# EAGLE board PCB (EAGLE 9.7.0)
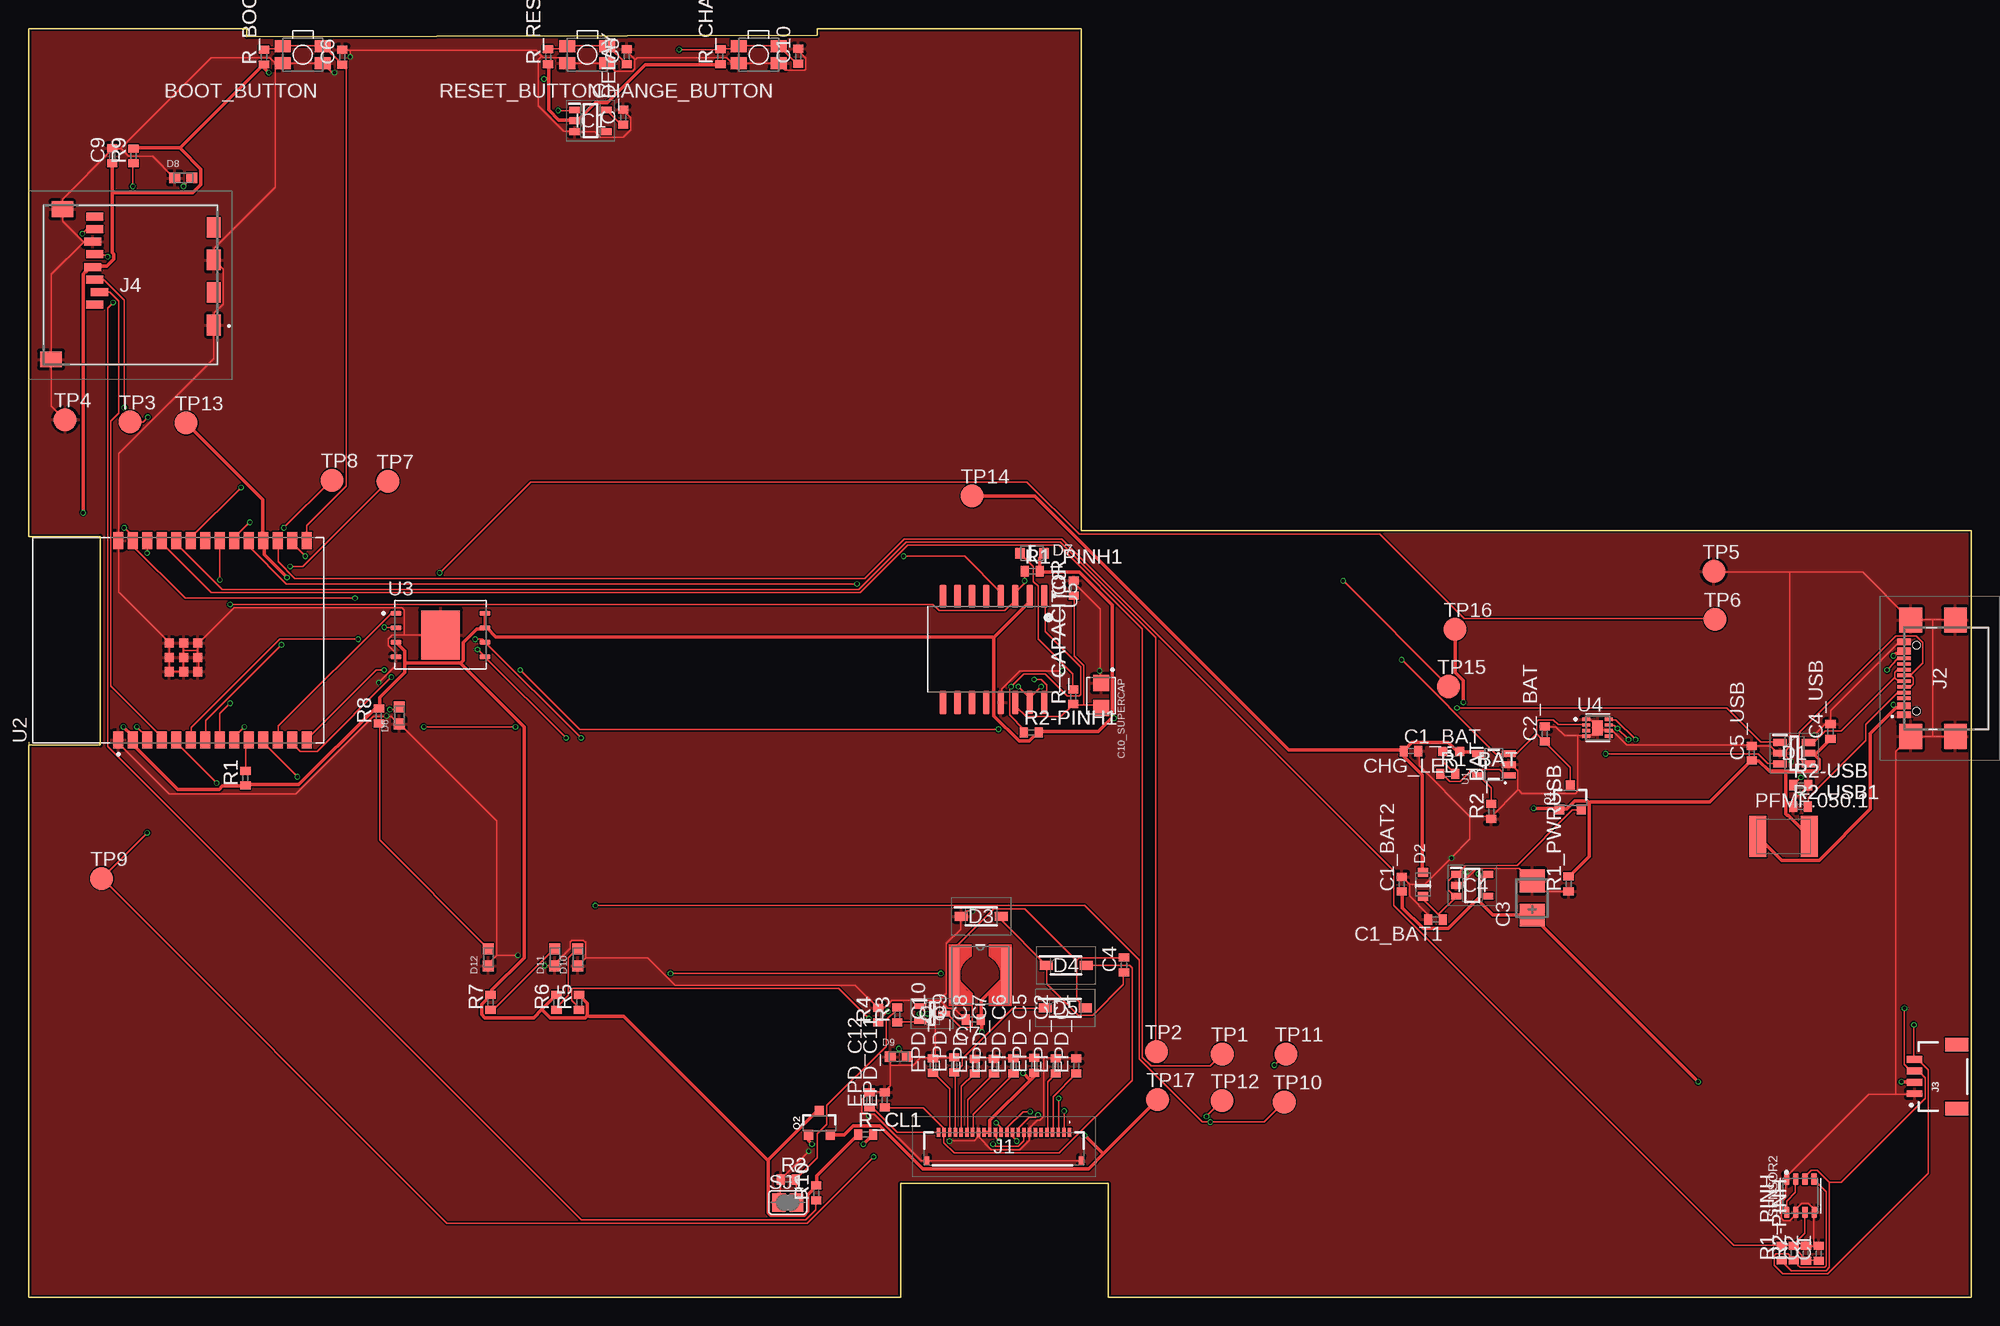
[diagram p0: board, top side]
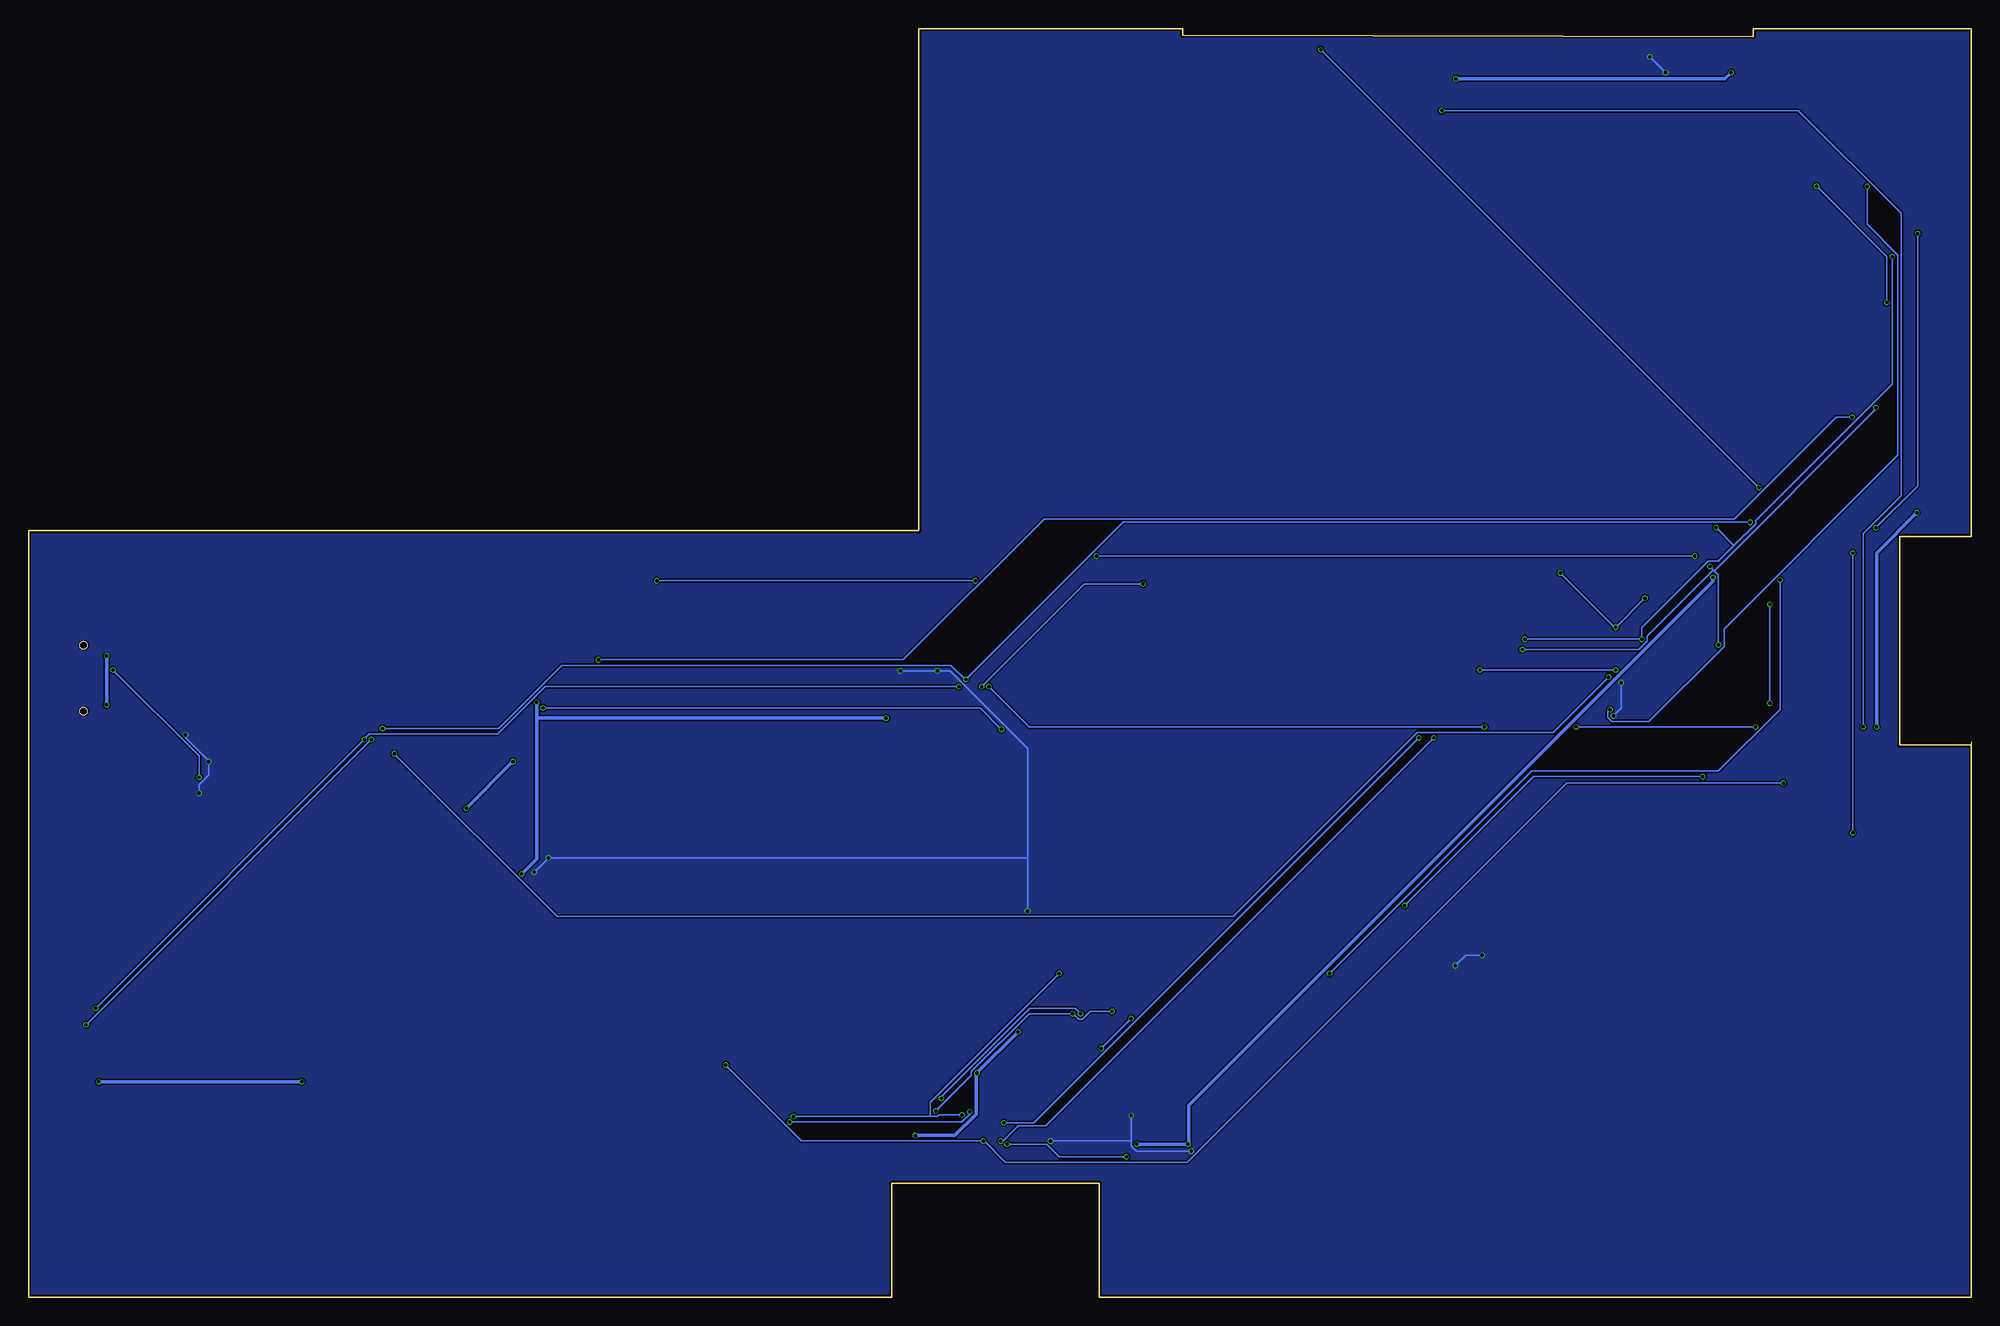
[diagram p1: board, bottom side, seen from below]

Size 170.2 x 111.2 mm. Coordinates in mm from the lower left corner, seen from the top.
Outline: 92.2,111.2 69.1,111.2
Outline: 0,48.7 0,48.4
Outline: 92.2,111.2 92.2,67.2 170.2,67.2 170.2,0 94.6,0 94.6,10 76.4,10 76.4,0 0,0 0,48.4
Outline: 69.1,111.2 69.1,110.6 19.1,110.5 19.1,111.2 0,111.2 0,66.7 6.3,66.7 6.3,48.4 0,48.4
Outline: 69.1,111.2 92.2,111.2
Copper layers (1*16): Top 0.035mm / dielectric 1.6mm / Bottom 0.035mm
Design rules "jlcpcb-2layers.dru *": minimum track width 0.15mm, minimum drill 0.3mm, track to track 5mil, track to pad 5mil, pad to pad 5mil, via to via 5mil, smd to smd 5mil, copper to edge 0.15mm, drill to drill 6mil, minimum pad ring 10mil, minimum via ring 3mil, stop-mask expansion 4mil, vias tented up to drill 0mil, thermal gap 10mil
Net classes: 1 New Class: width 0.3 mm

## Footprints (pad centres in the part's own frame; a part is rotated, then mirrored left to right if it is on the bottom)
MYBUTTON = smd 1.4 x 1.05: 1 1.75,0.75; 2 -1.75,0.75; 3 -1.75,-0.75; 4 1.75,-0.75
EAGLE-LTSPICE_C0402 = smd 0.7 x 0.9: 1 -0.65,0; 2 0.65,0
RCL_CT3528 = smd 2 x 2.2: + -1.5,0; - 1.5,0
ESP32_WROVER_EAGLE-LTSPICE_C0402 = smd 0.7 x 0.9: 1 -0.65,0; 2 0.65,0
CAPCP3225X100N = smd 1.4 x 1.4: 1 -1.1,0; 2 1.1,0
ADAFRUIT_CHIP-LED0603 = smd 0.8 x 0.8: A 0,-0.75; C 0,0.75
SOT95P280X145-6N = smd 1.2 x 0.6: 1 -1.25,0.95; 2 -1.25,0; 3 -1.25,-0.95; 4 1.25,-0.95; 5 1.25,0; 6 1.25,0.95
ESP32_WROVER_AVX---SD0805S020S1R0_AVX_SD0805S020S1R0_0 = smd 0.8 x 0.9: 1 -1.05,0; 2 1.05,0
SOD3716X135N = smd 1.15 x 0.8: 1 -1.75,0; 2 1.75,0
DIOC1608X36N = smd 0.97 x 0.94: 1 -0.75,0; 2 0.75,0
SOT95P280X125-5N = smd 0.9 x 0.6: 1 -1.4,0.95; 2 -1.4,0; 3 -1.4,-0.95; 4 1.4,-0.95; 5 1.4,0.95
SOT95P280X120-5N = smd 0.9 x 0.6: 1 -1.4,0.95; 2 -1.4,0; 3 -1.4,-0.95; 4 1.4,-0.95; 5 1.4,0.95
FH34SRJ24S05SH99 = smd 0.3 x 0.8: 1 5.75,1.45; 2 5.25,1.45; 3 4.75,1.45; 4 4.25,1.45; 5 3.75,1.45; 6 3.25,1.45; 7 2.75,1.45; 8 2.25,1.45; 9 1.75,1.45; 10 1.25,1.45; 11 0.75,1.45; 12 0.25,1.45; 13 -0.25,1.45; 14 -0.75,1.45; 15 -1.25,1.45; 16 -1.75,1.45; 17 -2.25,1.45; 18 -2.75,1.45; 19 -3.25,1.45; 20 -3.75,1.45; 21 -4.25,1.45; 22 -4.75,1.45; 23 -5.25,1.45; 24 -5.75,1.45 | smd 0.4 x 0.8: MP1 6.75,-1.05; MP2 -6.75,-1.05
SAMACSYS_PARTS_USB4110GFA = smd 0.3 x 1.15: A1 -3.35,3.678; A4 -2.55,3.678; A5 -1.25,3.678; A6 -0.25,3.678; A7 0.25,3.678; A8 1.25,3.678; A9 2.55,3.678; A12 3.35,3.678; B1 3.05,3.678; B4 2.25,3.678; B5 1.75,3.678; B6 0.75,3.678; B7 -0.75,3.678; B8 -1.75,3.678; B9 -2.25,3.678; B12 -3.05,3.678 | smd 2.18 x 2: MP1 -5.11,-0.827; MP2 5.11,-0.827; MP3 -5.11,3.103; MP4 5.11,3.103 | hole 0.65: -2.89,2.603; 2.89,2.603
JST04_1MM_RA = smd 0.6 x 1.35: 1 -1.5,0; 2 -0.5,0; 3 0.5,0; 4 1.5,0 | smd 1.2 x 2: NC1 2.8,-3.675; NC2 -2.8,-3.675
112ATAARR03ATTEND = smd 1.8 x 1.2: G1 10.6,10.4; G2 4.9,10.4; S1 7.75,10.4; S2 2.05,10.4 | smd 1.4 x 1.9: G3 13.6,-3.85; G4 0.45,-2.85 | smd 0.7 x 1.5: P1 8.8,0; P2 7.7,0.4; P3 6.6,0; P4 5.5,-0.2; P5 4.4,0; P6 3.3,-0.2; P7 2.2,0; P8 1.1,0
IND_4828-WE-TPC_WRE = smd 0.889 x 4.826: 1 -2.286,0; 2 2.286,0
ESP32C6_VARISTOR_CT/CN1812 = smd 1.5 x 3.6: 1 -2.25,0; 2 2.25,0
ESP32_WROVER_SPARKFUN-DISCRETESEMI_SOT23-3 = smd 0.8 x 0.9: 1 -0.95,-1; 2 0.95,-1; 3 0,1.1
SOT65P210X110-3N = smd 1.05 x 0.5: 1 -1.05,0.65; 2 -1.05,-0.65; 3 1.05,0
ESP32_WROVER_EAGLE-LTSPICE_R0402 = smd 0.7 x 0.9: 1 -0.65,0; 2 0.65,0
ESP32_WROVER_BME680_PSON80P300X300X100-8N = smd 1.016 x 0.5: 1 1.458,1.2; 2 1.458,0.4; 3 1.458,-0.4; 4 1.458,-1.2; 5 -1.458,-1.22; 6 -1.458,-0.4; 7 -1.458,0.4; 8 -1.458,1.2
SJ = smd 1.168 x 1.6: 1 -0.762,0; 2 0.762,0
TP20R = smd 2 x 2: TP 0,0
ESP32_WROVER_SPARKFUN-IC-POWER_SOT23-5 = smd 0.55 x 1.2: 1 -0.95,-1.3; 2 0,-1.3; 3 0.95,-1.3; 4 0.95,1.3; 5 -0.95,1.3
XCVR_ESP32-C6-WROOM-1-N8 = smd 1.5 x 0.9: 1 -8.75,5.26; 2 -8.75,3.99; 3 -8.75,2.72; 4 -8.75,1.45; 5 -8.75,0.18; 6 -8.75,-1.09; 7 -8.75,-2.36; 8 -8.75,-3.63; 9 -8.75,-4.9; 10 -8.75,-6.17; 11 -8.75,-7.44; 12 -8.75,-8.71; 13 -8.75,-9.98; 14 -8.75,-11.25; 15 8.75,-11.25; 16 8.75,-9.98; 17 8.75,-8.71; 18 8.75,-7.44; 19 8.75,-6.17; 20 8.75,-4.9; 21 8.75,-3.63; 22 8.75,-2.36; 23 8.75,-1.09; 24 8.75,0.18; 25 8.75,1.45; 26 8.75,2.72; 27 8.75,3.99; 28 8.75,5.26 | smd 0.8 x 0.8: 29_1 -2.755,0.79; 29_2 -1.505,0.79; 29_3 -0.255,0.79; 29_4 -2.755,-0.46; 29_5 -1.505,-0.46; 29_6 -0.255,-0.46; 29_7 -2.755,-1.71; 29_8 -1.505,-1.71; 29_9 -0.255,-1.71
SON127P600X800X80-9N = smd 0.94 x 0.44: 1 -3.895,1.905; 2 -3.895,0.635; 3 -3.895,-0.635; 4 -3.895,-1.905; 5 3.895,-1.905; 6 3.895,-0.635; 7 3.895,0.635; 8 3.895,1.905 | smd 3.4 x 4.3: 9 0,0
SON50P200X200X80-9N = smd 0.76 x 0.27: 1 -0.985,0.75; 2 -0.985,0.25; 3 -0.985,-0.25; 4 -0.985,-0.75; 5 0.985,-0.75; 6 0.985,-0.25; 7 0.985,0.25; 8 0.985,0.75 | smd 0.9 x 1.3: 9 0,0
SOIC127P1032X265-16N = smd 2.05 x 0.59: 1 -4.655,4.445; 2 -4.655,3.175; 3 -4.655,1.905; 4 -4.655,0.635; 5 -4.655,-0.635; 6 -4.655,-1.905; 7 -4.655,-3.175; 8 -4.655,-4.445; 9 4.655,-4.445; 10 4.655,-3.175; 11 4.655,-1.905; 12 4.655,-0.635; 13 4.655,0.635; 14 4.655,1.905; 15 4.655,3.175; 16 4.655,4.445

## Placement (x,y rotation side)
BOOT_BUTTON  [MYBUTTON]  24.03,108.91 180 top
C1  100nF  [EAGLE-LTSPICE_C0402]  156.82,3.86 90 top
C1_BAT  4.7uF  [EAGLE-LTSPICE_C0402]  121.11,47.88 0 top
C1_BAT1  4.7uF  [EAGLE-LTSPICE_C0402]  123.25,33.12 180 top
C1_BAT2  4.7uF  [EAGLE-LTSPICE_C0402]  120.29,36.22 90 top
C2  100nF  [EAGLE-LTSPICE_C0402]  155.7,3.86 90 top
C2_BAT  4.7uF  [EAGLE-LTSPICE_C0402]  132.82,49.38 90 top
C3  100uF TANT  [RCL_CT3528]  131.71,35 90 top
C4  4.7uF/25V  [EAGLE-LTSPICE_C0402]  95.96,29.14 90 top
C4_USB  100nF  [EAGLE-LTSPICE_C0402]  157.85,49.6 90 top
C5  1uF  [EAGLE-LTSPICE_C0402]  52.41,108.74 90 top
C5_USB  4.7uF  [EAGLE-LTSPICE_C0402]  150.96,47.7 90 top
C6  100nF  [EAGLE-LTSPICE_C0402]  27.48,108.68 90 top
C7  10uF  [EAGLE-LTSPICE_C0402]  82.77,24.36 180 top
C8  100nF  [EAGLE-LTSPICE_C0402]  91.56,62.16 90 top
C9  100nF  [ESP32_WROVER_EAGLE-LTSPICE_C0402]  7.34,100.06 90 top
C10  100nF  [EAGLE-LTSPICE_C0402]  67.42,108.76 90 top
C10_SUPERCAP  CPH3225A  [CAPCP3225X100N]  93.95,52.74 270 top
C_DELAY  100nF  [EAGLE-LTSPICE_C0402]  52.09,103.42 90 top
CHANGE_BUTTON  [MYBUTTON]  63.96,108.91 180 top
CHG_LED  [ADAFRUIT_CHIP-LED0603]  124.64,47.85 90 top
D1  USBLC6-2SC6Y  [SOT95P280X145-6N]  154.68,47.7 0 top
D2  ESP32_WROVER_AVX---SD0805S020S1R0_AVX_SD0805S020S1R0_0_0AVX_SD0805S020S1R0_0_0  [ESP32_WROVER_AVX---SD0805S020S1R0_AVX_SD0805S020S1R0_0]  122.15,36.21 90 top
D3  MBR0530  [SOD3716X135N]  83.45,33.4 0 top
D4  MBR0530  [SOD3716X135N]  90.89,29.1 0 top
D5  MBR0530  [SOD3716X135N]  90.82,25.38 0 top
D6  PGB1010603MR  [DIOC1608X36N]  32.48,51 90 top
D7  SD0805S020S1R0  [ESP32_WROVER_AVX---SD0805S020S1R0_AVX_SD0805S020S1R0_0]  87.9,65.21 0 top
D8  PGB1010603MR  [DIOC1608X36N]  13.56,98.1 0 top
D9  PGB1010603MR  [DIOC1608X36N]  76.24,21.1 0 top
D10  PGB1010603MR  [DIOC1608X36N]  48.12,29.8 90 top
D11  PGB1010603MR  [DIOC1608X36N]  46.1,29.8 90 top
D12  PGB1010603MR  [DIOC1608X36N]  40.28,29.8 90 top
EPD_C1  1uF/50V  [EAGLE-LTSPICE_C0402]  91.77,20.3 90 top
EPD_C2  1uF/50V  [EAGLE-LTSPICE_C0402]  89.98,20.3 90 top
EPD_C5  0.1uF/50V  [EAGLE-LTSPICE_C0402]  88.1,20.34 90 top
EPD_C6  1uF/50V  [EAGLE-LTSPICE_C0402]  86.29,20.3 90 top
EPD_C7  1uF/50V  [EAGLE-LTSPICE_C0402]  84.58,20.28 90 top
EPD_C8  1uF/50V  [EAGLE-LTSPICE_C0402]  82.89,20.28 90 top
EPD_C9  1uF/50V  [EAGLE-LTSPICE_C0402]  81.1,20.38 90 top
EPD_C10  1uF/50V  [EAGLE-LTSPICE_C0402]  79.23,20.32 90 top
EPD_C11  1uF/50V  [EAGLE-LTSPICE_C0402]  75.01,17.32 90 top
EPD_C12  1uF/50V  [EAGLE-LTSPICE_C0402]  73.67,17.32 90 top
IC1  BD5229G-TR  [SOT95P280X125-5N]  49.23,103.12 0 top
IC4  XC6220A331MR-G  [SOT95P280X120-5N]  126.47,36.12 0 top
J1  FH34SRJ-24S-0.5SH_99_  [FH34SRJ24S05SH99]  85.45,13.02 0 top
J2  SAMACSYS_PARTS_USB4110-GF-A  [SAMACSYS_PARTS_USB4110GFA]  167.97,54.26 90 top
J3  QWIIC_RIGHT_ANGLE  [JST04_1MM_RA]  165.22,19.36 90 top
J4  112A-TAAR-R03_ATTEND  [112ATAARR03ATTEND]  5.82,95.81 270 top
L1  68uH  [IND_4828-WE-TPC_WRE]  83.37,28.25 0 top
PFMF.050.1  ESP32C6_VARISTORCN1812  [ESP32C6_VARISTOR_CT/CN1812]  153.74,40.4 0 top
Q1  20V/4.2A/52mΩ/1.4W  [ESP32_WROVER_SPARKFUN-DISCRETESEMI_SOT23-3]  135.06,43.76 0 top
Q2  20V/4.2A/52mΩ/1.4W  [ESP32_WROVER_SPARKFUN-DISCRETESEMI_SOT23-3]  69.28,15.26 0 top
Q3  SI1308EDL-T1-GE3  [SOT65P210X110-3N]  79.15,24.88 0 top
R1  [ESP32_WROVER_EAGLE-LTSPICE_R0402]  19,45.5 90 top
R1_BAT  200  [ESP32_WROVER_EAGLE-LTSPICE_R0402]  124.33,45.88 0 top
R1_PINH  10K  [ESP32_WROVER_EAGLE-LTSPICE_R0402]  153.58,3.9 90 top
R1_PINH1  10K  [ESP32_WROVER_EAGLE-LTSPICE_R0402]  87.92,63.64 0 top
R1_PWRUSB  100K  [ESP32_WROVER_EAGLE-LTSPICE_R0402]  134.91,36.24 90 top
R2  2.2  [ESP32_WROVER_EAGLE-LTSPICE_R0402]  66.55,10.34 0 top
R2-PINH  10K  [ESP32_WROVER_EAGLE-LTSPICE_R0402]  154.64,3.9 90 top
R2-PINH1  10K  [ESP32_WROVER_EAGLE-LTSPICE_R0402]  87.85,49.52 0 top
R2-USB  5k1  [ESP32_WROVER_EAGLE-LTSPICE_R0402]  155.25,44.88 0 top
R2-USB1  5K1  [ESP32_WROVER_EAGLE-LTSPICE_R0402]  155.22,43 0 top
R2_BAT  2K  [ESP32_WROVER_EAGLE-LTSPICE_R0402]  128.14,42.58 90 top
R3  0.47  [ESP32_WROVER_EAGLE-LTSPICE_R0402]  76.09,24.76 90 top
R4  10k  [ESP32_WROVER_EAGLE-LTSPICE_R0402]  74.43,24.74 90 top
R5  10K  [ESP32_WROVER_EAGLE-LTSPICE_R0402]  48.23,25.86 90 top
R6  10K  [ESP32_WROVER_EAGLE-LTSPICE_R0402]  46.25,25.86 90 top
R7  10K  [ESP32_WROVER_EAGLE-LTSPICE_R0402]  40.47,25.86 90 top
R8  10K  [ESP32_WROVER_EAGLE-LTSPICE_R0402]  30.69,50.96 90 top
R9  10K  [ESP32_WROVER_EAGLE-LTSPICE_R0402]  9.19,100.04 90 top
R10  10K  [ESP32_WROVER_EAGLE-LTSPICE_R0402]  69.01,9.16 90 top
R_BOOT  10K  [ESP32_WROVER_EAGLE-LTSPICE_R0402]  20.63,108.7 90 top
R_CAPACITOR  15  [ESP32_WROVER_EAGLE-LTSPICE_R0402]  91.51,52.64 90 top
R_CHANGE  10K  [ESP32_WROVER_EAGLE-LTSPICE_R0402]  60.61,108.74 90 top
R_CL1  10k  [ESP32_WROVER_EAGLE-LTSPICE_R0402]  73.33,14.28 0 top
R_RESET  10K  [ESP32_WROVER_EAGLE-LTSPICE_R0402]  45.51,108.72 90 top
RESET_BUTTON  [MYBUTTON]  48.95,108.91 180 top
SENSOR2  BME688  [ESP32_WROVER_BME680_PSON80P300X300X100-8N]  155.21,8.92 90 top
SJ1  [SJ]  66.5,8.32 0 top
TP1  TPTP20R  [TP20R]  104.57,21.34 0 top
TP2  TPTP20R  [TP20R]  98.79,21.54 0 top
TP3  TPTP20R  [TP20R]  8.89,76.72 0 top
TP4  TPTP20R  [TP20R]  3.21,76.92 0 top
TP5  TPTP20R  [TP20R]  147.63,63.62 0 top
TP6  TPTP20R  [TP20R]  147.75,59.42 0 top
TP7  TPTP20R  [TP20R]  31.47,71.52 0 top
TP8  TPTP20R  [TP20R]  26.59,71.62 0 top
TP9  TPTP20R  [TP20R]  6.41,36.72 0 top
TP10  TPTP20R  [TP20R]  110,17.14 0 top
TP11  TPTP20R  [TP20R]  110.15,21.34 0 top
TP12  TPTP20R  [TP20R]  104.55,17.24 0 top
TP13  TPTP20R  [TP20R]  13.8,76.64 0 top
TP14  TPTP20R  [TP20R]  82.65,70.24 0 top
TP15  TPTP20R  [TP20R]  124.4,53.54 0 top
TP16  TPTP20R  [TP20R]  124.95,58.54 0 top
TP17  TPTP20R  [TP20R]  98.9,17.34 0 top
U1  MCP73831  [ESP32_WROVER_SPARKFUN-IC-POWER_SOT23-5]  128.36,46.69 90 top
U2  ESP32-C6-WROOM-1-N8  [XCVR_ESP32-C6-WROOM-1-N8]  13.13,57.59 90 top
U3  W25Q512JVEIQ  [SON127P600X800X80-9N]  36.09,58.06 0 top
U4  MAX17048G+T10  [SON50P200X200X80-9N]  137.45,49.92 0 top
U5  DS3231SN#  [SOIC127P1032X265-16N]  84.55,56.8 270 top

## Library data of the parts
BOOT_BUTTON CHANGE_BUTTON CHG_LED PFMF.050.1 RESET_BUTTON SJ1 TP1-TP17 = DeskAssistant v19 v1
C1 C1_BAT C1_BAT1 C1_BAT2 C2 C2_BAT C4 C4_USB C5 C5_USB C6-C10 C_DELAY EPD_C1 EPD_C2 EPD_C5-EPD_C12 = DeskAssistant v19 v1; SPICEMODEL: NONE; SPICEPREFIX: C
C3 = DeskAssistant v19 v1; SPICEPREFIX: C
C10_SUPERCAP = DeskAssistant v19 v1; AVAILABILITY: Not in stock; CHECK_PRICES: https://www.snapeda.com/parts/CPH3225A/Seiko+Instruments/view-part/?ref=eda; DESCRIPTION: 11 mF (EDLC) Supercapacitor 3.3 V 1210 (3225 Metric) - -; MF: Seiko Instruments; MP: CPH3225A; PACKAGE: 1210 Seiko; PRICE: None; PURCHASE-URL: https://www.snapeda.com/api/url_track_click_mouser/?unipart_id=562593&manufacturer=Seiko Instruments&part_name=CPH3225A&search_term=None; SNAPEDA_LINK: https://www.snapeda.com/parts/CPH3225A/Seiko+Instruments/view-part/?ref=snap
D1 = DeskAssistant v19 v1; AVAILABILITY: In Stock; CHECK_PRICES: https://www.snapeda.com/parts/USBLC6-2SC6Y/STMicroelectronics/view-part/?ref=eda; DESCRIPTION: 17V Clamp 5A (8/20µs) Ipp Tvs Diode Surface Mount SOT-23-6; MF: STMicroelectronics; MP: USBLC6-2SC6Y; PACKAGE: SOT-23-6 STMicroelectronics; PRICE: None; SNAPEDA_LINK: https://www.snapeda.com/parts/USBLC6-2SC6Y/STMicroelectronics/view-part/?ref=snap
D2 D7 = DeskAssistant v19 v1; CENTROID_NOT_SPECIFIED: No; DATASHEET: http://datasheets.avx.com/schottky.pdf; DIGIKEY_DESCRIPTION: DIODE SCHOTTKY 20V 1A 0805; DIGIKEY_PART_NUMBER: 478-7800-1-ND; LEAD_FREE: yes; MANUFACTURER: SD0805S020S1R0; MF: AVX; MOUSER_PART_NUMBER: 581-SD0805S020S1R0; PACKAGE: 0805 (2012 metric); PREFIX: D; ROHS: yes; TEMPERATURE_RANGE_HIGH: +125°C; TEMPERATURE_RANGE_LOW: -55°C
D3-D5 = DeskAssistant v19 v1; AVAILABILITY: In Stock; CHECK_PRICES: https://www.snapeda.com/parts/MBR0530/Onsemi/view-part/?ref=eda; DESCRIPTION: Diode Schottky 30 V 500mA Surface Mount SOD-123; MF: ON Semiconductor; MP: MBR0530; PACKAGE: SOD-123-2 ON Semiconductor; PRICE: None; PURCHASE-URL: https://www.snapeda.com/api/url_track_click_mouser/?unipart_id=179458&manufacturer=ON Semiconductor&part_name=MBR0530&search_term=None; SNAPEDA_LINK: https://www.snapeda.com/parts/MBR0530/Onsemi/view-part/?ref=snap
D6 D8-D12 = DeskAssistant v19 v1; AVAILABILITY: In Stock; CHECK_PRICES: https://www.snapeda.com/parts/PGB1010603MR/Littelfuse/view-part/?ref=eda; DESCRIPTION: 150V (Typ) Clamp - Ipp Tvs Diode Surface Mount 0603 (1608 Metric); MF: Littelfuse Inc.; MP: PGB1010603MR; PACKAGE: 0603 Littelfuse Inc.; PRICE: None; PURCHASE-URL: https://www.snapeda.com/api/url_track_click_mouser/?unipart_id=5659453&manufacturer=Littelfuse Inc.&part_name=PGB1010603MR&search_term=None; SNAPEDA_LINK: https://www.snapeda.com/parts/PGB1010603MR/Littelfuse/view-part/?ref=snap
IC1 = DeskAssistant v19 v1; DESCRIPTION: Voltage Detector with Adjustable Delay Time: CMOS processes are utilized to develop high precision, low current consumption CMOS reset ICs that allow arbitrary setting of the delay time. The extensive lineup includes both Nch Open Drain and CMOS output types in a wide range of detection voltages (from 2.3V to 6.0V, in 0.1V steps), enabling selection of the ideal solution based on customer requirements. In addition, the entire series is of course both lead-free and RoHS-compliant.; HEIGHT: 1.25mm; MANUFACTURER_NAME: ROHM Semiconductor; MANUFACTURER_PART_NUMBER: BD5229G-TR; MOUSER_PART_NUMBER: 755-BD5229G-TR; MOUSER_PRICE-STOCK: https://www.mouser.co.uk/ProductDetail/ROHM-Semiconductor/BD5229G-TR?qs=4kLU8WoGk0vvnhrrYwdszw%3D%3D
IC4 = DeskAssistant v19 v1; DESCRIPTION: LDO Voltage Regulators; HEIGHT: 1.2mm; MANUFACTURER_NAME: Torex; MANUFACTURER_PART_NUMBER: XC6220A331MR-G; MOUSER_PART_NUMBER: 865-XC6220A331MR-G; MOUSER_PRICE-STOCK: https://www.mouser.co.uk/ProductDetail/Torex-Semiconductor/XC6220A331MR-G?qs=AsjdqWjXhJ8ZSWznL1J0gg%3D%3D
J1 = DeskAssistant v19 v1; DESCRIPTION: 24 Position FFC, FPC Connector Contacts, Top and Bottom 0.020" (0.50mm) Surface Mount, Right Angle; HEIGHT: 1.1mm; MANUFACTURER_NAME: Hirose; MANUFACTURER_PART_NUMBER: FH34SRJ-24S-0.5SH(99); MOUSER_PART_NUMBER: 798-FH34SRJ24S05SH99; MOUSER_PRICE-STOCK: https://www.mouser.co.uk/ProductDetail/Hirose-Connector/FH34SRJ-24S-0.5SH99?qs=vcbW%252B4%252BSTIpKBl5ap9J8Fw%3D%3D
J2 = DeskAssistant v19 v1; DESCRIPTION: CONN USB 2.0 TYPE-C R/A SMT; HEIGHT: 3.26mm; MANUFACTURER_NAME: GCT (GLOBAL CONNECTOR TECHNOLOGY); MANUFACTURER_PART_NUMBER: USB4110-GF-A; MOUSER_PART_NUMBER: 640-USB4110-GF-A; MOUSER_PRICE-STOCK: https://www.mouser.co.uk/ProductDetail/GCT/USB4110-GF-A?qs=KUoIvG%2F9IlYiZvIXQjyJeA%3D%3D
J3 = DeskAssistant v19 v1; PROD_ID: CONN-13694
J4 = DeskAssistant v19 v1; DESCRIPTION: Micro SD Card Socket, Push-Push Type, Top Mount, SMT, H=1.83mm, 10u; HEIGHT: 1.9mm; MANUFACTURER_NAME: ATTEND; MANUFACTURER_PART_NUMBER: 112A-TAAR-R03 ATTEND
L1 = DeskAssistant v19 v1; COPYRIGHT: Copyright (C) 2024 Ultra Librarian. All rights reserved.; MANUFACTURER_PART_NUMBER: 744043680; MFR_NAME: Wurth Electronics
Q1 Q2 = DeskAssistant v19 v1; MANUFACTURER: DMG2305UX-7; PROD_ID: TRAN-14388
Q3 = DeskAssistant v19 v1; AVAILABILITY: In Stock; CHECK_PRICES: https://www.snapeda.com/parts/SI1308EDL-T1-GE3/Vishay+Siliconix/view-part/?ref=eda; DESCRIPTION: Si1308EDL-T1-GE3 N-channel MOSFET Transistor, 1.5 A, 30 V, 3-Pin SC-70 | Siliconix / Vishay SI1308EDL-T1-GE3; MF: Vishay Siliconix; MP: SI1308EDL-T1-GE3; PACKAGE: SOT-323 Vishay Semiconductor; PRICE: None; PURCHASE-URL: https://www.snapeda.com/api/url_track_click_mouser/?unipart_id=274603&manufacturer=Vishay Siliconix&part_name=SI1308EDL-T1-GE3&search_term=None; SNAPEDA_LINK: https://www.snapeda.com/parts/SI1308EDL-T1-GE3/Vishay+Siliconix/view-part/?ref=snap
R1 R1_BAT R1_PINH R1_PINH1 R1_PWRUSB R2 R2-PINH R2-PINH1 R2-USB R2-USB1 R2_BAT R3-R10 R_BOOT R_CAPACITOR R_CHANGE R_CL1 R_RESET = DeskAssistant v19 v1; SPICEMODEL: NONE; SPICEPREFIX: R
SENSOR2 = DeskAssistant v19 v1; AVAILABILITY: Unavailable; DESCRIPTION: Integrated Environmental Unit; MF: Bosch Sensortec; MP: BME680; PACKAGE: LGA-8 Bosch Tools; PRICE: None
U1 = DeskAssistant v19 v1; PROD_ID: IC-09995
U2 = DeskAssistant v19 v1; AVAILABILITY: In Stock; CHECK_PRICES: https://www.snapeda.com/parts/ESP32-C6-WROOM-1-N8/Espressif+Systems/view-part/?ref=eda; DESCRIPTION: Multiprotocol Modules ESP32-C6 module, Wi-Fi 6 in 2.4 GHz band, Bluetooth 5, Zigbee 3.0 and Thread. ESP34-WROOM Compatible - ENGINEERING SAMPLE; MF: Espressif Systems; MP: ESP32-C6-WROOM-1-N8; PACKAGE: None; PRICE: None; SNAPEDA_LINK: https://www.snapeda.com/parts/ESP32-C6-WROOM-1-N8/Espressif+Systems/view-part/?ref=snap
U3 = DeskAssistant v19 v1; AVAILABILITY: In Stock; CHECK_PRICES: https://www.snapeda.com/parts/W25Q512JVEIQ/Winbond+Electronics/view-part/?ref=eda; DESCRIPTION: FLASH - NOR Memory IC 512Mb (64M x 8) SPI - Quad I/O 133 MHz 8-WSON (8x6); MF: Winbond Electronics; MP: W25Q512JVEIQ; PACKAGE: Package; PRICE: None; SNAPEDA_LINK: https://www.snapeda.com/parts/W25Q512JVEIQ/Winbond+Electronics/view-part/?ref=snap
U4 = DeskAssistant v19 v1; AVAILABILITY: In Stock; CHECK_PRICES: https://www.snapeda.com/parts/MAX17048G+T10/Analog+Devices/view-part/?ref=eda; DESCRIPTION: 3µA 1-Cell/2-Cell Fuel Gauge with ModelGauge; MF: Analog Devices; MP: MAX17048G+T10; PACKAGE: TDFN-8 Maxim; PRICE: None; PURCHASE-URL: https://www.snapeda.com/api/url_track_click_mouser/?unipart_id=329239&manufacturer=Analog Devices&part_name=MAX17048G+T10&search_term=None; SNAPEDA_LINK: https://www.snapeda.com/parts/MAX17048G+T10/Analog+Devices/view-part/?ref=snap
U5 = DeskAssistant v19 v1; AVAILABILITY: In Stock; CHECK_PRICES: https://www.snapeda.com/parts/DS3231SN%23/Analog+Devices/view-part/?ref=eda; DESCRIPTION: Extremely Accurate I²C-Integrated RTC/TCXO/Crystal; MF: Analog Devices; MP: DS3231SN#; PACKAGE: SOIC-16 Maxim; PRICE: None; PURCHASE-URL: https://www.snapeda.com/api/url_track_click_mouser/?unipart_id=99048&manufacturer=Analog Devices&part_name=DS3231SN#&search_term=None; SNAPEDA_LINK: https://www.snapeda.com/parts/DS3231SN%23/Analog+Devices/view-part/?ref=snap

## Nets
3V3 [New Class]: C1_BAT2.1 C3.+ C9.1 D7.2 IC1.2 IC4.5 J3.2 J4.P4 Q2.3 R1.1 R1_PINH1.2 R2-PINH1.2 R5.2 R6.2 R7.2 R8.2 R9.2 R10.2 R_BOOT.1 R_CHANGE.1 R_CL1.1 R_RESET.1 TP16.TP U2.2 U3.3 U3.7 U3.8 U5.2
32KHZ: R2-PINH1.1 U2.9 U5.1
DN: D1.4 J2.A7 J2.B7
DP: D1.6 J2.A6 J2.B6
EPD_3V3 [New Class]: C7.1 EPD_C5.1 J1.15 J1.16 L1.2 Q2.2 TP17.TP
EPD_3V3_C [New Class]: Q2.1 R_CL1.2 TP13.TP U2.18
EPD_BUSY: J1.9 TP9.TP U2.26
EPD_CS: J1.12 TP10.TP U2.11
EPD_DC: J1.11 TP11.TP U2.5
EPD_RST: J1.10 TP12.TP U2.21
FLASH_CS: U2.12 U3.1
GDR: J1.2 Q3.1 R4.1
GND: BOOT_BUTTON.1 BOOT_BUTTON.2 C1.2 C1_BAT1.2 C1_BAT2.2 C1_BAT.2 C2.2 C2_BAT.2 C3.- C4_USB.2 C5.2 C5_USB.2 C6.2 C7.2 C8.2 C9.2 C10.2 C10_SUPERCAP.1 C_DELAY.2 CHANGE_BUTTON.1 CHANGE_BUTTON.2 D1.2 D3.1 D6.1 D8.1 D9.1 D10.1 D11.1 D12.1 EPD_C1.2 EPD_C2.2 EPD_C5.2 EPD_C6.2 EPD_C7.2 EPD_C8.2 EPD_C9.2 EPD_C10.2 EPD_C11.2 EPD_C12.2 IC1.3 IC4.2 J1.8 J1.17 J1.MP1 J1.MP2 J2.A1 J2.A12 J2.B1 J2.B12 J2.MP1 J2.MP2 J2.MP3 J2.MP4 J3.1 J4.G1 J4.G2 J4.G3 J4.G4 J4.P6 R1_PWRUSB.1 R2-USB1.1 R2-USB.2 R2.1 R2_BAT.1 R4.2 RESET_BUTTON.1 RESET_BUTTON.2 SENSOR2.1 SENSOR2.5 SENSOR2.7 SJ1.1 TP4.TP TP5.TP U1.2 U2.1 U2.28 U2.29_1 U2.29_2 U2.29_3 U2.29_4 U2.29_5 U2.29_6 U2.29_7 U2.29_8 U2.29_9 U3.4 U3.9 U4.1 U4.4 U4.6 U4.9 U5.13
GPIO8: R1.2 U2.10
I2C_PW: C1.1 C2.1 R1_PINH.2 R2-PINH.2 SENSOR2.6 U2.17
INT_RTC: R1_PINH1.1 TP15.TP U2.8 U5.3
IO/BOOT: BOOT_BUTTON.3 BOOT_BUTTON.4 C6.1 R_BOOT.2 U2.15
IO/CHANGE: C10.1 CHANGE_BUTTON.3 CHANGE_BUTTON.4 R_CHANGE.2 U2.23
MISO: J4.P7 TP6.TP U2.27 U3.2
MOSI: J1.14 J4.P3 TP7.TP U2.7 U3.5
N$1: J2.A5 R2-USB1.2
N$2: C1_BAT1.1 D2.1 IC4.1 IC4.3 Q1.2
N$3: R1_BAT.1 U1.1
N$4: C4.1 D3.2 D4.1
N$5: CHG_LED.C R1_BAT.2
N$6: EPD_C12.1 J1.24
N$7: R2_BAT.2 U1.5
N$8: SENSOR2.2 SENSOR2.8
N$9: C_DELAY.1 IC1.5
N$10: EPD_C10.1 J1.22
N$11: EPD_C8.1 J1.20
N$13: EPD_C7.1 J1.19
N$14: J2.B5 R2-USB.1
N$15: EPD_C6.1 J1.18
N$16: D8.2 R10.1
N$17: D6.2 R9.1
N$18: C5.1 R_RESET.2 RESET_BUTTON.3 RESET_BUTTON.4
N$19: D9.2 R5.1
N$20: D10.2 R6.1
N$21: D11.2 R7.1
N$22: D12.2 R8.1
N$23: EPD_C2.1 J1.5
N$24: EPD_C1.1 J1.4
N$32: D7.1 R_CAPACITOR.2
PREVGH: D5.1 EPD_C9.1 J1.21
PREVGL: D4.2 EPD_C11.1 J1.23
RESE: J1.3 Q3.2 R3.1
RESE': R2.2 R3.2 SJ1.2
RESET: IC1.1 U2.3
RTC_RST: U2.16 U5.4
RX: TP2.TP U2.24
SCK: J1.13 J4.P5 TP8.TP U2.6 U3.6
SCL: J3.4 R2-PINH.1 SENSOR2.4 U2.20 U4.7 U5.16
SDA: J3.3 R1_PINH.1 SENSOR2.3 U2.19 U4.8 U5.15
SRC: C4.2 D5.2 L1.1 Q3.3
SS_SD: J4.P2 U2.4
TX: TP1.TP U2.25
USB_D+: D1.1 U2.14
USB_D-: D1.3 U2.13
VBAT: C2_BAT.1 Q1.3 TP3.TP U1.3 U4.2 U4.3
VBUS [New Class]: C1_BAT.1 C4_USB.1 C5_USB.1 CHG_LED.A D1.5 D2.2 PFMF.050.1.2 Q1.1 R1_PWRUSB.2 TP14.TP U1.4
VRTC: C8.1 C10_SUPERCAP.2 R_CAPACITOR.1 U5.14
VUSB [New Class]: J2.A4 J2.A9 J2.B4 J2.B9 PFMF.050.1.1

## Tracks (layer width: path | path; a pad name or v marks a point on that pad's centre or on a via)
3V3  (via drill 0.3)
  Top 0.3: 126.9,34.87 127.14,35.11 127.14,36.36 127.45,36.67 | 126.9,34.87 124.37,32.34 122.16,32.34 120.36,34.14 120.36,35.52 C1_BAT2.1 | 127.45,36.67 127.83,37.05 IC4.5 | v125.69,52.15 125.69,54.08 125,54.78 125,58.52 TP16.TP | 127.45,36.67 v127,37.12 | v164.05,18.91 165.16,18.91 J3.2 | v146.26,18.91 131.71,33.45 C3.+ 131.57,33.52 128.25,33.52 126.9,34.87 | 45.57,106.78 45.57,104.08 46.47,103.18 47.78,103.18 IC1.2 47.92,103.25 48.2,103.25 49.65,104.71 50.69,104.71 54.02,108.03 60.59,108.03 R_CHANGE.1 | 45.57,106.78 45.57,108.03 R_RESET.1 | 7.34,96.81 7.34,91.55 7.48,91.41 7.48,91 6.86,90.37 5.68,90.37 J4.P4 5.47,90.3 5.05,89.89 4.99,89.89 4.78,89.68 v4.78,68.77 | 7.34,96.81 7.34,99.37 C9.1 | 13.3,100.76 9.21,100.76 R9.2 | 13.3,100.76 20.57,108.03 R_BOOT.1 20.57,107.82 v21.05,107.34 | 7.34,96.81 14.4,96.81 15.1,97.5 15.1,98.89 13.37,100.62 13.3,100.76 | v45.15,106.78 45.57,106.78 | 44.98,25.24 46.19,26.45 R6.2 | 44.98,25.24 44.25,24.52 39.96,24.52 39.68,24.79 39.68,25.69 40.44,26.45 R7.2 40.58,26.59 40.58,26.94 43.42,29.78 43.42,50 37.95,55.47 37.88,55.61 | 48.96,24.72 48.96,25.76 48.27,26.45 R5.2 | 48.96,24.72 48.75,24.52 45.7,24.52 44.98,25.24 | R_CL1.1 72.64,14.27 69.04,10.66 69.04,9.83 R10.2 68.97,9.7 68.28,9 68.28,7.55 67.93,7.2 65.03,7.2 64.82,7.41 64.82,12.05 | 64.82,12.05 69.11,16.34 69.25,16.34 Q2.3 | 48.96,24.72 49.1,24.65 52.15,24.65 64.68,12.12 64.82,12.05 | D7.2 88.92,65.16 88.57,64.82 R1_PINH1.2 88.71,63.57 92.03,63.57 94.94,60.66 94.94,50.83 | 84.55,57.82 84.55,50.97 86.77,48.75 87.67,48.75 88.43,49.51 R2-PINH1.2 88.64,49.58 93.69,49.58 94.94,50.83
  Top 0.3: 84.55,57.82 87.67,60.94 87.67,61.42 U5.2 | U3.7 40.03,58.72 40.03,59.9 U3.8 | 32.96,55.61 32.96,56.65 32.2,57.41 U3.3 | 32.96,55.61 32.96,54.78 30.75,52.56 30.75,51.66 R8.2 30.54,51.59 30.33,51.59 23.68,44.94 19.11,44.94 R1.1 18.97,44.8 16.97,44.8 16.69,44.53 13.09,44.53 9.14,48.48 9.14,48.82 U2.2 9.07,48.96 9.07,49.24 v8.31,50 | 37.88,55.61 38.09,55.82 38.09,57.41 39.27,58.59 39.89,58.59 U3.7 | 32.96,55.61 37.88,55.61 | 84.55,57.82 84.42,57.89 40.93,57.89 40.16,58.66 U3.7 | v95.08,50.76 94.94,50.83
  Bottom 0.3: 125.69,50.76 125.69,38.43 v127,37.12 | 125.69,50.76 v125.69,52.15 | v146.26,18.91 v164.05,18.91 | v45.15,106.78 21.61,106.78 v21.05,107.34 | v4.78,68.77 8.31,65.23 v8.31,50 | v95.08,50.76 125.69,50.76
32KHZ  (via drill 0.3)
  Top 0.15: R2-PINH1.1 87.19,49.58 87.19,49.79 85.94,51.04 85.94,53.39 v86.08,53.53 87.19,54.64 89.06,54.64 91,52.7 92.03,52.7 92.17,52.84 92.17,55.26 89.06,58.38 89.06,61.42 U5.1 | v18.91,50 18.07,49.17 18.07,48.89 U2.9 | v42.66,50 v34.62,50
  Bottom 0.15: v34.62,50 v18.91,50 | v42.66,50 82.55,50 v86.08,53.53
DN
  Top 0.15: 164.88,54.57 164.33,54.57 J2.A7 | 164.88,54.57 165.92,55.61 165.92,57.41 165.37,57.96 163.57,57.96 155.12,49.51 155.12,47.3 155.6,46.81 155.88,46.81 D1.4 | J2.B7 164.33,53.53 164.88,53.53 165.09,53.74 165.09,54.29 164.88,54.5 164.88,54.57
DP
  Top 0.15: 163.5,54.29 163.78,54.02 164.26,54.02 J2.A6 | 163.5,54.29 163.5,54.78 163.71,54.98 164.26,54.98 J2.B6 | D1.6 155.95,48.68 156.44,48.68 157.41,49.65 158.79,49.65 163.43,54.29 163.5,54.29
EPD_3V3  (via drill 0.3)
  Top 0.3: L1.2 85.59,28.18 83.45,26.04 83.45,24.38 C7.1 83.52,24.24 v83.52,23.27 | J1.16 83.72,14.47 84.14,14.47 J1.15 84.21,14.61 84.21,15.51 87.74,19.04 | 87.74,19.04 88.09,19.39 88.09,19.67 EPD_C5.1 | 87.74,19.04 v87.12,19.67 | 94.14,12.57 98.89,17.31 TP17.TP | 94.14,12.57 92.86,11.29 78.32,11.29 74.58,15.03 72.23,15.03 71.47,14.27 70.29,14.27 Q2.2 | 94.14,12.57 v92.52,14.2
  Bottom 0.3: v83.52,23.27 v87.12,19.67 87.19,19.53 87.19,16.07 89.06,14.2 v92.52,14.2
EPD_3V3_C  (via drill 0.3)
  Top 0.3: v68.63,13.43 68.35,13.71 68.35,14.2 Q2.1 | v73.13,13.43 73.96,14.27 R_CL1.2 | TP13.TP 13.85,76.59 20.5,69.94 20.5,66.41 U2.18 20.64,66.2 20.64,65.09 v22.64,63.09
  Bottom 0.3: v73.13,13.43 v68.63,13.43 68.56,13.57 68.56,16.83 22.64,62.74 v22.64,63.09
EPD_BUSY  (via drill 0.3)
  Top 0.15: v84.48,13.43 84.69,13.23 86.7,13.23 87.19,13.71 87.19,14.4 J1.9 | v74.03,12.33 68.21,6.51 36.63,6.51 6.44,36.7 TP9.TP 6.44,36.77 v10.39,40.72 | v10.39,65.23 10.39,66.34 U2.26
  Bottom 0.15: v84.48,13.43 81.02,13.43 79.92,12.33 v74.03,12.33 | v10.39,40.72 v10.39,65.23
EPD_CS  (via drill 0.3)
  Top 0.15: v87.74,16.27 87.12,16.27 85.73,14.89 85.73,14.47 J1.12 | TP10.TP 109.97,17.11 108.24,15.37 v103.53,15.37 102.84,15.37 97.3,20.91 97.3,29.57 92.52,34.35 v49.65,34.35 | v23.55,45.64 20.57,48.61 20.57,48.82 U2.11
  Bottom 0.15: v87.74,16.27 87.74,16.07 88.43,15.37 v103.53,15.37 | v23.55,45.64 38.36,45.64 v49.65,34.35
EPD_DC  (via drill 0.3)
  Top 0.15: v86.56,13.71 86.22,14.06 86.22,14.4 J1.11 | v109.14,20.36 110.11,21.33 TP11.TP | v16.48,45.08 12.95,48.61 12.95,48.82 U2.5
  Bottom 0.15: v109.14,20.36 102.49,13.71 v86.56,13.71 86.49,13.71 84.62,11.84 68.7,11.84 35.46,45.08 v16.48,45.08
EPD_RST  (via drill 0.3)
  Top 0.15: v88.43,16 88.22,15.79 87.67,15.79 86.7,14.82 J1.10 | v103.18,15.86 104.5,17.17 TP12.TP | v16.76,62.88 U2.21 | v79.92,28.39 v56.23,28.39
  Bottom 0.15: v88.43,16 90.44,16 90.58,15.86 91.2,15.86 | v103.18,15.86 91.2,15.86 | v16.76,62.88 16.76,51.52 22.16,46.12 38.5,46.12 v56.23,28.39 | v79.92,28.39 91.2,17.11 91.2,15.86
FLASH_CS
  Top 0.15: U3.1 32.13,59.9 31.72,59.9 21.88,50.07 21.88,48.89 U2.12
GDR  (via drill 0.3)
  Top 0.15: v90.72,16.34 90.72,14.47 J1.2 | v78.74,24.86 78.11,25.48 Q3.1 | v75.28,25.07 74.44,24.24 74.44,24.1 R4.1
  Bottom 0.15: v90.72,16.34 87.6,19.46 87.6,19.8 82.55,24.86 v78.74,24.86 78.67,24.86 78.18,24.38 77.91,24.38 77.21,25.07 v75.28,25.07
GND  (via drill 0.3)
  Top 0.15: C10.2 67.45,109.35 67.45,109.21 68.07,108.58 68.07,107.61 68,107.55 66.27,107.55 65.72,108.1 CHANGE_BUTTON.2 65.65,108.17 62.26,108.17 CHANGE_BUTTON.1 62.19,108.17 61.63,108.17 61.15,108.65 53.32,108.65 53.18,108.52 53.12,108.52 | C_DELAY.2 52.15,104.01 52.77,103.39 52.77,102.35 52.08,101.66 50.07,101.66 49.58,102.14 47.85,102.14 IC1.3 47.78,102.21 46.88,102.21 44.67,104.43 44.67,108.44 44.98,108.76 | 53.12,108.52 52.42,109.21 52.42,109.35 C5.2 | 53.12,108.52 53.12,107.68 52.91,107.48 51.38,107.48 50.76,108.1 RESET_BUTTON.2 47.23,108.17 RESET_BUTTON.1 47.16,108.17 46.67,108.65 45.08,108.65 44.98,108.76 | 28.18,109.28 44.46,109.28 44.98,108.76 | 28.18,109.28 27.49,109.28 C6.2 | 32.89,58.03 36.08,58.03 U3.9 | 32.89,58.03 31.86,58.03 31.51,57.69 31.51,57.13 32.13,56.51 32.13,56.16 U3.4 32.13,56.09 32.13,55.33 v30.68,53.88 | U2.29_7 14.89,54.85 14.89,56.02 U2.29_8 14.82,56.16 14.82,56.72 | 14.82,56.72 14.82,57.27 U2.29_9 14.89,57.34 18,60.45 32.69,60.45 32.89,60.25 32.89,58.03 | 13.57,56.72 13.57,56.16 U2.29_5 13.57,56.02 13.57,54.91 U2.29_4 13.57,54.85 12.4,54.85 U2.29_1 12.33,54.85 12.33,56.02 U2.29_2 12.33,56.16 12.33,57.27 U2.29_3 12.33,57.41 7.89,61.84 7.89,66.34 U2.28 7.89,66.41 7.89,73.96 16.2,82.27 16.2,85.18 J4.G1 16.27,85.25 16.27,86.28 17.04,87.05 17.04,90.09 16.27,90.86 J4.G2 16.27,90.92 16.27,91.96 21.61,97.3 21.61,108.1 BOOT_BUTTON.1 | 13.57,56.72 13.57,57.27 U2.29_6 | 13.57,56.72 14.82,56.72 | TP4.TP 3.19,76.94 2.01,78.11 2.01,82.2 J4.G3 2.01,82.27 2.01,89.68 4.78,92.45 4.78,92.52 | 4.78,92.52 J4.P6 | 4.78,92.52 2.98,94.32 J4.G4 2.98,95.43 2.98,96.26 7.34,100.62 C9.2 7.34,100.69 8.1,100.69
  Top 0.15: BOOT_BUTTON.1 22.3,108.17 25.76,108.17 BOOT_BUTTON.2 25.83,108.1 26.59,107.34 v26.8,107.34 | 8.1,100.69 8.79,100 10.87,100 12.74,98.13 D8.1 | BOOT_BUTTON.1 22.23,108.17 21.61,108.17 21.12,108.65 16,108.65 8.1,100.76 8.1,100.69 | v28.18,108.72 28.18,109.28 | J2.A12 164.33,57.55 164.33,57.34 J2.B1 164.26,57.27 163.71,57.27 157.89,51.45 157.89,50.28 C4_USB.2 157.82,50.21 157.34,50.21 v156.44,49.31 | 126.21,36.95 126.87,37.6 130.61,37.6 131.64,36.56 C3.- 131.78,36.49 132.68,35.59 R1_PWRUSB.1 | 126.21,36.95 125.41,36.15 125.14,36.15 IC4.2 | 155.22,44.22 155.88,44.87 R2-USB.2 | 155.22,44.22 154.63,43.63 154.63,43 R2-USB1.1 | D1.2 153.39,47.71 153.18,47.71 152.56,48.34 150.97,48.34 C5_USB.2 150.9,48.41 140.02,48.41 138.78,49.65 138.5,49.65 U4.6 138.43,49.72 137.67,49.72 137.53,49.86 U4.9 | v154.43,46.95 153.74,47.64 153.46,47.64 D1.2 | v155.26,44.18 155.22,44.22 | U4.9 137.46,49.86 136.84,49.24 136.49,49.24 U4.4 136.42,49.24 135.73,49.24 | U4.1 136.49,50.62 136.84,50.62 137.39,50.07 137.39,49.93 U4.9 | 135.73,49.24 134.55,49.24 133.79,50 132.82,50 C2_BAT.2 | 120.98,36.22 120.98,35.18 122.57,33.59 122.57,33.17 C1_BAT1.2 | 120.98,36.22 120.36,36.84 C1_BAT2.2 | 130.47,44.46 128.18,42.17 128.18,41.97 R2_BAT.1 128.11,42.17 126.24,42.17 | 130.47,44.46 130.47,46.12 129.91,46.67 129.71,46.67 U1.2 | 126.24,42.17 121.81,46.6 121.81,47.85 C1_BAT.2 | 120.98,36.22 122.3,36.22 124.61,38.54 | 124.61,38.54 126.24,40.16 126.24,42.17 | 135.73,49.24 135.73,44.39 135.52,44.18 130.81,44.18 130.54,44.46 130.47,44.46 | v125.9,37.26 126.21,36.95 | v124.65,38.5 124.61,38.54 | 156.37,4.5 156.78,4.5 C1.2
  Top 0.15: 156.37,4.5 155.74,4.5 C2.2 | 156.37,4.5 156.37,7.41 SENSOR2.5 156.37,7.48 156.37,7.76 155.88,8.24 155.33,8.24 154.84,7.76 154.84,7.48 SENSOR2.7 154.77,7.41 154.77,7.2 154.29,6.72 153.74,6.72 153.53,6.92 153.53,8.38 153.94,8.79 153.94,10.32 SENSOR2.1 154.08,10.39 154.08,10.66 161.21,17.8 163.57,17.8 | 163.57,17.8 165.16,17.8 J3.1 | J2.B12 164.33,51.18 164.33,50.97 J2.A1 164.33,50.9 164.33,49.65 164.81,49.17 J2.MP3 | 166.82,49.17 164.88,49.17 J2.MP3 | 166.82,49.17 168.76,49.17 J2.MP1 | 154.29,63.57 160.66,63.57 164.81,59.42 J2.MP4 164.88,59.42 166.82,59.42 | 154.29,63.57 147.64,63.57 TP5.TP | 166.82,59.42 168.76,59.42 J2.MP2 | 166.82,59.42 166.82,49.17 | 163.57,17.8 163.57,47.85 164.81,49.1 J2.MP3 | 154.29,63.57 154.29,48.27 153.74,47.71 D1.2 | 41,29.98 40.3,29.29 40.3,29.09 D12.1 | 41,29.98 41,41.76 32.55,50.21 D6.1 32.41,50.28 31.79,50.9 31.37,50.9 | 31.37,50.9 30.19,50.9 23.41,44.11 12.33,44.11 7.89,48.54 7.89,48.82 U2.1 | 83.24,14.06 83.24,14.4 J1.17 | 83.24,14.06 84.35,12.95 86.84,12.95 87.67,13.78 87.67,14.4 J1.8 87.74,14.47 87.74,14.89 88.36,15.51 88.57,15.51 88.92,15.86 88.92,20.98 | EPD_C1.2 91.76,20.98 90.03,20.98 EPD_C2.2 89.96,20.98 88.92,20.98 | EPD_C8.2 82.89,20.98 84.55,20.98 EPD_C7.2 84.62,20.98 86.28,20.98 EPD_C6.2 86.36,20.98 88.09,20.98 EPD_C5.2 88.16,20.98 88.92,20.98 | SJ1.1 65.79,8.38 65.86,8.45 65.86,10.32 R2.1 65.93,10.39 v68.35,12.81 | EPD_C10.2 79.29,20.98 81.09,20.98 EPD_C9.2 | 73.61,16.07 73.13,16.07 72.99,16.2 72.99,17.31 73.61,17.94 EPD_C12.2 73.68,18 75,18 | 73.61,16.07 74.1,16.07 78.18,11.98 78.67,11.98 J1.MP2 78.74,11.98 92.17,11.98 J1.MP1
  Top 0.15: 75.48,20.36 75.48,18.56 75,18.07 | 75.48,20.36 75.48,21.05 D9.1 | 75.48,20.36 77.49,20.36 78.11,20.98 79.15,20.98 EPD_C10.2 | v73.61,15.93 73.61,16.07 | v80.68,13.71 82.82,13.71 83.17,14.06 83.24,14.06 | 93.9,54.91 93.9,53.88 C10_SUPERCAP.1 | 93.9,54.91 93.9,60.32 91.62,62.6 91.62,62.81 C8.2 | v90.58,54.91 86.84,54.91 85.25,53.32 85.25,52.15 U5.13 | v93.83,54.91 93.9,54.91 | 48.82,29.78 48.82,31.09 48.61,31.3 47.58,31.3 47.44,31.16 47.44,30.61 46.12,29.29 46.12,29.09 D11.1 46.05,29.09 v45.22,29.09 | 48.82,29.78 48.13,29.09 D10.1 | 79.84,26.04 79.43,26.04 | 79.43,26.04 75.62,26.04 75,25.41 74.44,25.41 R4.2 74.37,25.41 72.44,27.35 56.65,27.35 54.22,29.78 48.82,29.78 | 79.84,26.04 80.54,25.35 81.09,25.35 82.06,24.38 C7.2 | 79.84,26.04 79.84,26.11 80.4,26.66 80.4,31.02 81.65,32.27 81.65,33.38 D3.1 81.72,33.45 82.13,33.86 v82.68,33.86 | 79.43,26.04 79.43,21.05 EPD_C10.2 | v42.87,29.98 41,29.98 | v31.37,50.97 31.37,50.9
  Bottom 0.15: v26.8,107.34 v28.18,108.72 | v155.26,44.18 155.26,44.94 154.43,45.77 v154.43,46.95 154.43,47.02 156.44,49.03 v156.44,49.31 | v125.9,37.26 v124.65,38.5 82.68,38.5 | v68.35,12.81 73.13,12.81 73.61,13.3 73.61,13.71 | v73.61,15.93 73.61,13.71 | 73.61,13.71 v80.68,13.71 | v93.83,54.91 v90.58,54.91 89.47,54.91 82.68,48.13 82.68,38.5 | v82.68,33.86 82.68,38.5 | v42.87,29.98 44.32,29.98 v45.22,29.09 | v30.68,53.88 30.68,51.66 v31.37,50.97
  pour Top: 6.36,48.36 6.34,48.34 6.32,48.32 0.08,48.32 0.08,0.08 76.32,0.08 76.32,10.02 76.34,10.04 76.36,10.06 76.38,10.08 94.62,10.08 94.64,10.06 94.66,10.04 94.68,10.02 94.68,0.08 170.12,0.08 170.12,67.12 92.18,67.12 92.16,67.14 92.14,67.16 92.12,67.18 92.12,111.12 69.18,111.12 69.18,110.6 69.18,110.58 69.18,110.58 69.18,110.58 69.17,110.57 69.16,110.56 69.16,110.56 69.16,110.56 69.15,110.55 69.14,110.54 69.14,110.54 69.14,110.54 69.13,110.53 69.12,110.52 69.12,110.52 69.12,110.52 69.1,110.52 19.12,110.42 19.12,110.42 19.1,110.42 19.08,110.42 19.08,110.42 19.08,110.42 19.07,110.43 19.06,110.44 19.06,110.44 19.06,110.44 19.05,110.45 19.04,110.46 19.04,110.46 19.04,110.46 19.03,110.47 19.02,110.48 19.02,110.48 19.02,110.48 19.02,110.5 19.02,110.52 19.02,110.52 19.02,111.12 0.08,111.12 0.08,66.78 6.32,66.78 6.34,66.76 6.36,66.74 6.38,66.72 6.38,48.38
  pour Bottom: 6.36,48.36 6.34,48.34 6.32,48.32 0.08,48.32 0.08,0.08 76.32,0.08 76.32,10.02 76.34,10.04 76.36,10.06 76.38,10.08 94.62,10.08 94.64,10.06 94.66,10.04 94.68,10.02 94.68,0.08 170.12,0.08 170.12,67.12 92.18,67.12 92.16,67.14 92.14,67.16 92.12,67.18 92.12,111.12 69.18,111.12 69.18,110.6 69.18,110.58 69.18,110.58 69.18,110.58 69.17,110.57 69.16,110.56 69.16,110.56 69.16,110.56 69.15,110.55 69.14,110.54 69.14,110.54 69.14,110.54 69.13,110.53 69.12,110.52 69.12,110.52 69.12,110.52 69.1,110.52 19.12,110.42 19.12,110.42 19.1,110.42 19.08,110.42 19.08,110.42 19.08,110.42 19.07,110.43 19.06,110.44 19.06,110.44 19.06,110.44 19.05,110.45 19.04,110.46 19.04,110.46 19.04,110.46 19.03,110.47 19.02,110.48 19.02,110.48 19.02,110.48 19.02,110.5 19.02,110.52 19.02,110.52 19.02,111.12 0.08,111.12 0.08,66.78 6.32,66.78 6.34,66.76 6.36,66.74 6.38,66.72 6.38,48.38
GPIO8
  Top 0.15: R1.2 19.04,46.19 19.04,48.61 19.25,48.82 U2.10
I2C_PW
  Top 0.15: C1.1 156.78,3.25 155.74,3.25 C2.1 155.74,3.32 154.57,4.5 R2-PINH.2 | R2-PINH.2 154.63,4.57 153.6,4.57 R1_PINH.2 153.53,4.57 149.37,4.57 119.59,34.35 119.59,37.4 90.51,66.48 76.73,66.48 73.27,63.02 23.34,63.02 21.88,64.47 21.88,66.34 U2.17 | SENSOR2.6 155.6,7.41 155.6,5.61 154.63,4.64 R2-PINH.2
INT_RTC  (via drill 0.3)
  Top 0.15: R1_PINH1.1 87.25,63.57 v87.25,62.81 87.25,62.6 86.49,61.84 86.49,61.49 U5.3 86.42,61.42 86.42,61.08 85.52,60.18 79.78,60.18 79.22,60.73 v17.66,60.73 | v17.66,52.08 16.76,51.18 16.76,48.89 U2.8 | v115.16,62.81 124.37,53.6 TP15.TP
  Bottom 0.15: v17.66,60.73 v17.66,52.08 | v87.25,62.81 v115.16,62.81
IO/BOOT
  Top 0.15: R_BOOT.2 20.64,109.42 22.02,109.42 22.23,109.62 BOOT_BUTTON.4 22.3,109.69 25.76,109.69 BOOT_BUTTON.3 25.83,109.69 27.42,108.1 C6.1 27.49,107.96 27.84,107.61 27.84,71.12 24.38,67.66 U2.15
IO/CHANGE  (via drill 0.3)
  Top 0.15: C10.1 67.38,108.17 67.24,108.17 65.72,109.69 CHANGE_BUTTON.3 65.65,109.69 62.26,109.69 CHANGE_BUTTON.4 62.19,109.62 61.98,109.42 60.66,109.42 R_CHANGE.2 60.59,109.35 v56.99,109.35 | v18.63,70.98 14.27,66.62 14.27,66.41 U2.23
  Bottom 0.15: v56.99,109.35 v18.63,70.98
MISO  (via drill 0.3)
  Top 0.15: v31.16,58.72 32.13,58.72 U3.2 | v28.6,61.29 13.71,61.29 9.14,65.86 U2.27 9.07,66.41 9.07,66.76 v8.38,67.45 | v4.71,93.21 5.05,93.56 5.75,93.56 J4.P7 | v36.01,63.5 43.97,71.47 87.46,71.47 92.03,66.89 118.35,66.89 125.76,59.49 147.71,59.49 TP6.TP
  Bottom 0.15: v28.6,61.29 v31.16,58.72 31.23,58.72 v36.01,63.5 | v4.71,93.21 4.71,71.12 v8.38,67.45
MOSI  (via drill 0.3)
  Top 0.15: v22.16,57.2 15.51,50.55 15.51,48.89 U2.7 | v22.92,64.06 24.03,64.06 31.44,71.47 TP7.TP | v8.38,77.97 8.38,87.39 6.58,89.19 5.82,89.19 J4.P3 | v85.04,13.71 84.76,13.99 84.76,14.4 J1.14 | v47.09,49.03 40.03,56.09 U3.5 39.96,56.16 v39.33,56.78
  Bottom 0.15: v22.16,57.2 22.16,63.29 22.54,63.67 | v22.92,64.06 22.61,63.74 | 22.61,63.74 22.54,63.67 | v8.38,77.97 8.38,77.84 22.54,63.67 | v85.04,13.71 84.83,13.71 83.52,15.03 81.09,15.03 v47.09,49.03 | 22.61,63.74 28.39,57.96 28.39,57.55 29.15,56.78 v39.33,56.78
N$1
  Top 0.15: R2-USB1.2 155.88,43 155.88,43.77 160.94,48.82 160.94,50.21 163.71,52.98 164.26,52.98 J2.A5
N$2
  Top 0.15: 123.51,33.55 123.89,33.17 C1_BAT1.1 | 123.51,33.55 122.16,34.9 122.16,35.11 D2.1 | 123.51,33.55 125.07,35.11 IC4.3 125,35.11 124.37,35.73 124.37,36.49 124.93,37.05 125.07,37.05 IC4.1 125.14,37.12 125.9,37.88 130.4,37.88 135.25,42.73 136.01,42.73 Q1.2
N$3
  Top 0.15: R1_BAT.1 123.68,45.84 123.89,45.84 124.51,45.22 125.41,45.22 126.24,46.05 126.24,46.12 126.38,46.26 128.87,46.26 129.36,45.77 129.64,45.77 U1.1
N$4
  Top 0.15: C4.1 95.91,28.46 95.91,27.42 93.21,24.72 91.96,24.72 89.19,27.49 89.19,29.09 D4.1 89.12,29.15 85.25,33.03 85.25,33.38 D3.2
N$5
  Top 0.15: CHG_LED.C 123.96,47.78 123.96,46.88 124.93,45.91 R1_BAT.2
N$6
  Top 0.15: J1.24 79.64,14.47 76.11,14.47 73.96,16.62 73.68,16.62 EPD_C12.1
N$7
  Top 0.15: R2_BAT.2 128.11,43.28 128.11,44.67 127.07,45.7 U1.5
N$8
  Top 0.15: SENSOR2.8 154.01,7.48 154.01,8.45 154.77,9.21 154.77,10.32 SENSOR2.2
N$9
  Top 0.15: C_DELAY.1 52.08,102.84 51.87,102.84 50.69,104.01 IC1.5
N$10
  Top 0.15: J1.22 80.68,14.47 80.68,18.28 79.29,19.67 EPD_C10.1
N$11
  Top 0.15: J1.20 81.72,14.47 81.72,18.49 82.82,19.6 EPD_C8.1
N$13
  Top 0.15: J1.19 82.27,14.47 82.27,17.31 84.55,19.6 EPD_C7.1
N$14  (via drill 0.3)
  Top 0.15: v155.26,45.57 154.63,44.94 R2-USB.1 | v162.81,54.98 163.5,55.68 163.5,55.75 163.71,55.95 164.26,55.95 J2.B5
  Bottom 0.15: v155.26,45.57 155.26,47.44 v162.81,54.98
N$15
  Top 0.15: J1.18 82.75,14.47 82.75,16.07 86.28,19.6 EPD_C6.1
N$16  (via drill 0.3)
  Top 0.15: v7.41,87.19 6.92,86.7 6.92,48.27 48.41,6.79 68.07,6.79 68.97,7.69 68.97,8.45 R10.1 | v13.57,97.36 14.27,98.06 D8.2
  Bottom 0.15: v7.41,87.19 7.41,91.2 v13.57,97.36
N$17  (via drill 0.3)
  Top 0.15: v9.14,97.36 9.14,99.37 R9.1 | v31.65,51.52 32.27,51.52 32.48,51.73 D6.2
  Bottom 0.15: v9.14,97.36 9.14,94.04 6.44,91.34 6.44,73.82 21.68,58.59 21.68,57.06 28.25,50.48 31.51,50.48 31.86,50.83 31.86,51.31 v31.65,51.52
N$18
  Top 0.15: C5.1 52.35,108.1 50.76,109.69 RESET_BUTTON.3 50.69,109.69 47.23,109.69 RESET_BUTTON.4 47.16,109.62 46.95,109.42 45.5,109.42 R_RESET.2
N$19  (via drill 0.3)
  Top 0.15: v73.61,24.45 70.98,27.08 47.64,27.08 47.58,27.01 47.58,26.04 48.2,25.41 48.2,25.28 R5.1 | v76.24,21.81 76.94,21.12 D9.2
  Bottom 0.15: v76.24,21.81 v73.61,24.45
N$20
  Top 0.15: R6.1 46.26,25.28 46.26,25.41 47.3,26.45 47.3,29.78 48.06,30.54 D10.2
N$21
  Top 0.15: R7.1 40.51,25.28 40.79,25.28 46.05,30.54 D11.2
N$22
  Top 0.15: R8.1 30.75,50.28 30.75,40.1 40.23,30.61 D12.2
N$23
  Top 0.15: J1.5 89.26,14.47 89.26,18.91 89.96,19.6 EPD_C2.1
N$24
  Top 0.15: J1.4 89.75,14.47 89.75,17.59 91.76,19.6 EPD_C1.1
N$32
  Top 0.15: D7.1 86.91,65.16 88.02,64.06 88.02,62.74 88.43,62.33 88.43,57.69 91.48,54.64 91.48,53.32 R_CAPACITOR.2
PREVGH
  Top 0.15: J1.21 81.16,14.47 81.16,19.67 EPD_C9.1 81.16,19.74 81.78,20.36 81.78,20.91 86.22,25.35 89.06,25.35 D5.1
PREVGL
  Top 0.15: EPD_C11.1 75.07,16.62 78.39,16.62 80.19,14.82 J1.23 80.19,14.4 80.19,13.57 81.09,12.67 90.3,12.67 96.67,19.04 96.67,28.88 96.47,29.09 92.66,29.09 D4.2
RESE  (via drill 0.3)
  Top 0.15: v90.23,17.45 90.23,14.47 J1.3 | v78.05,24.86 78.05,24.24 Q3.2 78.05,24.17 76.11,24.17 R3.1
  Bottom 0.15: v90.23,17.45 90.23,17.59 82.48,25.35 78.53,25.35 v78.05,24.86
RESE'
  Top 0.15: SJ1.2 67.24,8.38 67.24,10.32 R2.2 67.24,10.39 69.11,12.26 69.11,14.34 69.94,15.17 69.94,16.83 75.14,22.02 75.14,24.31 76.04,25.21 76.04,25.35 R3.2
RESET  (via drill 0.3)
  Top 0.15: v46.4,104.01 47.78,104.01 IC1.1 | v9.49,50 10.39,49.1 10.39,48.89 U2.3
  Bottom 0.15: v46.4,104.01 15.17,104.01 6.16,95.01 6.16,70.29 9.49,66.97 v9.49,50
RTC_RST  (via drill 0.3)
  Top 0.15: v24.24,64.96 23.13,66.06 23.13,66.34 U2.16 | v76.66,64.96 81.99,64.96 85.18,61.77 85.18,61.49 U5.4
  Bottom 0.15: v76.66,64.96 v24.24,64.96
RX
  Top 0.15: U2.24 12.95,66.06 16.97,62.05 72.71,62.05 76.87,66.2 90.37,66.2 98.75,57.82 98.75,21.61 TP2.TP
SCK  (via drill 0.3)
  Top 0.15: v84.76,15.3 85.18,14.89 85.18,14.47 J1.13 | v48.41,49.03 40.03,57.41 U3.6 39.96,57.48 39.75,57.69 v39.13,57.69 | v28.88,57.69 22.02,57.69 14.27,49.93 14.27,48.89 U2.6 | v6.92,91.2 6.79,91.34 5.82,91.34 J4.P5 | v22.37,67.45 26.52,71.61 TP8.TP
  Bottom 0.15: v84.76,15.3 82.13,15.3 v48.41,49.03 | v39.13,57.69 v28.88,57.69 28.88,58.72 23.06,64.54 22.16,64.54 20.81,65.89 | v6.92,91.2 6.92,80.05 18.91,68.07 18.91,67.8 20.81,65.89 | 20.81,65.89 v22.37,67.45
SCL  (via drill 0.3)
  Top 0.15: SENSOR2.4 156.44,10.32 157.47,9.28 157.47,2.77 157.34,2.63 155.19,2.63 154.98,2.84 154.98,2.91 R2-PINH.1 154.63,3.32 154.15,3.81 153.04,3.81 152.9,3.67 152.9,2.84 153.67,2.08 157.61,2.08 166.41,10.87 166.41,19.94 165.51,20.84 165.3,20.84 J3.4 165.16,20.91 v165.16,23.89 | v140.16,48.89 v139.19,49.86 138.92,50.14 138.5,50.14 U4.7 | v19.39,67.93 18.07,66.62 18.07,66.41 U2.20 | v88.09,54.15 88.71,54.15 89.19,53.67 89.19,52.28 89.06,52.15 U5.16
  Bottom 0.15: v165.16,23.89 v140.16,48.89 | v19.39,67.93 74.31,67.93 v88.09,54.15 88.16,54.15 89.4,55.4 123.47,55.4 129.01,49.86 v139.19,49.86
SDA  (via drill 0.3)
  Top 0.15: 157.75,10.11 157.75,2.63 157.47,2.35 154.43,2.35 153.6,3.19 R1_PINH.1 | 157.75,10.11 156.71,11.15 156.16,11.15 155.67,10.66 155.67,10.39 SENSOR2.3 | v140.78,48.89 139.05,50.62 138.5,50.62 U4.8 | v164.33,25.35 164.33,20.43 164.88,19.88 165.16,19.88 J3.3 165.3,19.88 165.51,19.88 166.13,19.25 166.13,17.45 158.79,10.11 157.75,10.11 | v72.57,62.53 22.58,62.53 19.32,65.79 19.32,66.34 U2.19 | v86.7,53.53 87.67,52.56 87.67,52.15 U5.15 87.74,52.56 v88.71,53.53
  Bottom 0.15: v164.33,25.35 v140.78,48.89 140.78,48.96 140.37,49.38 129.08,49.38 124.93,53.53 v88.71,53.53 | v72.57,62.53 77.7,62.53 v86.7,53.53
SRC
  Top 0.15: Q3.3 80.26,24.86 80.47,24.86 81.65,23.68 82.55,23.68 82.68,23.82 82.68,26.59 81.09,28.18 L1.1 81.09,28.32 81.09,30.61 84.55,34.07 87.25,34.07 91.76,29.57 91.83,29.57 | 91.83,29.57 92.03,29.78 95.91,29.78 C4.2 | 91.83,29.57 91.83,26.11 92.52,25.41 D5.2
SS_SD
  Top 0.15: J4.P2 6.23,88.09 7.13,88.09 7.89,87.32 7.89,77.49 7.2,76.8 7.2,53.6 11.63,49.17 11.63,48.89 U2.4
TX
  Top 0.15: U2.25 11.7,66.34 11.7,66.06 16,61.77 72.85,61.77 77.01,65.93 90.23,65.93 97.57,58.59 97.57,21.05 98.33,20.29 103.53,20.29 TP1.TP
USB_D+  (via drill 0.3)
  Top 0.15: v125.14,51.66 148.75,51.66 151.73,48.68 153.39,48.68 D1.1 | v84.97,49.79 48.27,49.79 v43.07,54.98 | v31.16,54.98 30.47,54.98 24.38,48.89 U2.14
  Bottom 0.15: v125.14,51.66 86.84,51.66 v84.97,49.79 | v31.16,54.98 v43.07,54.98
USB_D-  (via drill 0.3)
  Top 0.15: v138.15,47.64 151.52,47.64 152.35,46.81 153.39,46.81 D1.3 | v31.79,54.36 25.28,47.85 23.82,47.85 23.13,48.54 23.13,48.82 U2.13
  Bottom 0.15: v138.15,47.64 123.89,33.38 64.68,33.38 48.54,49.51 36.63,49.51 v31.79,54.36
VBAT  (via drill 0.3)
  Top 0.15: U4.3 136.49,49.72 136.49,50.14 U4.2 136.42,50.21 134,50.21 133.58,50.62 132.27,50.62 132.13,50.48 132.13,49.38 | Q1.3 135.04,44.87 135.04,46.47 132.82,48.68 C2_BAT.1 132.75,48.75 132.13,49.38 | 132.13,49.38 132.06,49.38 130.33,47.64 129.71,47.64 U1.3 129.64,47.64 128.53,47.64 v120.29,55.88 | v10.46,77.14 10.04,76.73 8.93,76.73 TP3.TP
  Bottom 0.15: v10.46,77.14 11.84,77.14 20.77,68.21 81.23,68.21 93.56,55.88 v120.29,55.88
VBUS  (via drill 0.3)
  Top 0.3: 136.7,43.35 136.56,43.49 135.45,43.49 134.76,42.8 134.14,42.8 Q1.1 134,42.87 v131.85,42.87 | 136.7,43.35 136.7,38.64 134.97,36.91 R1_PWRUSB.2 | 153.94,46.12 156.64,46.12 156.85,46.33 156.85,47.16 156.47,47.54 | 153.94,46.12 152.49,46.12 151.59,47.02 150.97,47.02 C5_USB.1 150.83,46.95 147.29,43.42 136.84,43.42 136.7,43.35 | 156.47,47.54 156.37,47.64 155.95,47.64 D1.5 | 156.47,47.54 157.82,48.89 C4_USB.1 | 153.94,46.12 153.94,42.38 154.08,42.24 154.15,42.24 155.95,40.44 PFMF.050.1.2 | D2.2 122.09,37.33 122.09,45.77 120.5,47.37 120.5,47.85 C1_BAT.1 | C1_BAT.1 120.56,47.99 121.19,48.61 124.37,48.61 125.07,47.92 125.27,47.92 CHG_LED.A 125.41,47.78 126.87,47.78 127,47.64 U1.4 127.14,47.58 v127.77,46.95 | TP14.TP 82.68,70.22 88.16,70.22 110.39,47.99 120.36,47.99 C1_BAT.1
  Bottom 0.3: v127.77,46.95 v131.85,42.87
VRTC
  Top 0.15: 92.45,51.94 93.63,51.94 93.9,51.66 C10_SUPERCAP.2 | 92.45,51.94 91.55,51.94 R_CAPACITOR.1 91.48,51.94 90.44,50.9 87.39,50.9 86.49,51.8 86.49,52.08 U5.14 | 92.45,51.94 92.45,55.4 91.62,56.23 91.62,61.49 C8.1
VUSB  (via drill 0.3)
  Top 0.3: J2.A9 164.33,56.78 164.33,56.58 J2.B4 164.19,56.44 163.57,56.44 v163.36,56.23 | J2.B9 164.33,52.01 164.33,51.73 J2.A4 164.19,51.66 163.57,51.66 | 163.57,51.66 161.35,49.44 161.35,42.8 156.85,38.3 153.6,38.3 151.52,40.37 PFMF.050.1.1 | v163.36,51.94 163.5,51.8 163.57,51.66
  Bottom 0.3: v163.36,51.94 v163.36,56.23